# EAGLE board daughterboard (EAGLE 9.5.2)

Size 256.21 x 198.11 mm. Coordinates in mm from the lower left corner, seen from the top.
Outline: 0,0 256.21,0 256.21,198.11 0,198.11 0,0
Copper layers (1*16): Top 0.035mm / dielectric 1.5mm / Bottom 0.035mm
Design rules "default": minimum track width 6mil, minimum drill 0.35mm, track to track 6mil, track to pad 6mil, pad to pad 6mil, via to via 6mil, smd to smd 6mil, copper to edge 40mil, drill to drill 6mil, minimum pad ring 10mil, minimum via ring 8mil, stop-mask expansion 4mil, vias tented up to drill 0mil, thermal gap 10mil

## Footprints (pad centres in the part's own frame; a part is rotated, then mirrored left to right if it is on the bottom)
1X02/90 = drill 1.016 long: 1 -1.27,-3.81; 2 1.27,-3.81
0204/5 = drill 0.813 octagon: 1 -2.54,0; 2 2.54,0
AC01 = drill 1.1 pad 2: 1 -8.9,0; 2 8.9,0
MX1A-XXNN = drill 1.5: 1 -3.81,2.54; 2 2.54,5.08 | hole 4: 0,0
TO92 = drill 0.813 octagon: 1 1.27,0; 2 0,1.905; 3 -1.27,0
W12864 = smd 1.8 x 2.5: 1 15.24,-33.02; 2 12.7,-33.02; 02 12.7,-33.02; 3 10.16,-33.02; 4 7.62,-33.02; 5 5.08,-33.02; 6 2.54,-33.02; 7 0,-33.02; 8 -2.54,-33.02; 9 -5.08,-33.02; 10 -7.62,-33.02; 11 -10.16,-33.02; 12 -12.7,-33.02; 13 -15.24,-33.02; 14 -17.78,-33.02; 15 -20.32,-33.02; 16 -22.86,-33.02; 17 -25.4,-33.02; 18 -27.94,-33.02; 19 -30.48,-33.02; 20 -33.02,-33.02 | drill 0.8 square: P$1 15.24,-33.02; P$2 -33.02,-33.02; P$3 -30.48,-33.02; P$4 -27.94,-33.02; P$5 -25.4,-33.02; P$6 -22.86,-33.02; P$7 -20.32,-33.02; P$8 -17.78,-33.02; P$9 -15.24,-33.02; P$10 -12.7,-33.02; P$11 -10.16,-33.02; P$12 -7.62,-33.02; P$13 -5.08,-33.02; P$14 -2.54,-33.02; P$15 0,-33.02; P$16 2.54,-33.02; P$17 5.08,-33.02; P$18 7.62,-33.02; P$19 10.16,-33.02; P$20 12.7,-33.02
BLUE_PILL = drill 0.8 long: P$1 -7.62,15.24; P$2 -7.62,12.7; P$3 -7.62,10.16; P$4 -7.62,7.62; P$5 -7.62,5.08; P$6 -7.62,2.54; P$7 -7.62,0; P$8 -7.62,-2.54; P$9 -7.62,-5.08; P$10 -7.62,-7.62; P$11 -7.62,-10.16; P$12 -7.62,-12.7; P$13 -7.62,-15.24; P$14 -7.62,-17.78; P$15 -7.62,-20.32; P$16 -7.62,-22.86; P$17 -7.62,-25.4; P$18 -7.62,-27.94; P$19 -7.62,-30.48; P$20 -7.62,-33.02; P$21 7.62,15.24; P$22 7.62,12.7; P$23 7.62,10.16; P$24 7.62,7.62; P$25 7.62,5.08; P$26 7.62,2.54; P$27 7.62,0; P$28 7.62,-2.54; P$29 7.62,-5.08; P$30 7.62,-7.62; P$31 7.62,-10.16; P$32 7.62,-12.7; P$33 7.62,-15.24; P$34 7.62,-17.78; P$35 7.62,-20.32; P$36 7.62,-22.86; P$37 7.62,-25.4; P$38 7.62,-27.94; P$39 7.62,-30.48; P$40 7.62,-33.02
BATTERY-CHARGER-LI-PROT = drill 1.2 pad 2.5 square: B+ 10.795,3.81; B- 10.795,-3.81; IN+ -12.065,6.985; IN- -12.065,-6.985; OUT+ 10.795,6.985; OUT- 10.795,-6.985
AI-THINKER_RA-01 = smd 2.184 x 1.067: P$1 -8,7; P$2 -8,5; P$3 -8,3; P$4 -8,1; P$5 -8,-1; P$6 -8,-3; P$7 -8,-5; P$8 -8,-7; P$9 8,-7; P$10 8,-5; P$11 8,-3; P$12 8,-1; P$13 8,1; P$14 8,3; P$15 8,5; P$16 8,7
DC-DC-STEP-UP-5V = drill 1: 5V 6.985,-3.81; D+ 6.985,1.27; D- 6.985,-1.27; GND 6.985,3.81 | drill 1 pad 2 square: IN+ -10.795,6.985; IN- -10.795,-6.985

## Placement (x,y rotation side)
JP1  [1X02/90]  -35.56,129.54 0 top  (outside the outline)
R1  10k  [0204/5]  -110.49,-3.81 0 top  (outside the outline)
R3  10k  [AC01]  -91.44,125.73 0 top  (outside the outline)
R7  10k  [AC01]  -22.86,143.51 0 top  (outside the outline)
SW1  CHERRY_MX  [MX1A-XXNN]  76.2,63.5 0 bottom
SW2  CHERRY_MX  [MX1A-XXNN]  57.15,63.5 0 bottom
SW3  CHERRY_MX  [MX1A-XXNN]  38.1,63.5 0 bottom
SW4  CHERRY_MX  [MX1A-XXNN]  19.05,63.5 0 bottom
SW5  CHERRY_MX  [MX1A-XXNN]  -187.96,-3.81 0 top  (outside the outline)
SW6  CHERRY_MX  [MX1A-XXNN]  -204.47,-3.81 0 top  (outside the outline)
SW7  CHERRY_MX  [MX1A-XXNN]  -220.98,-3.81 0 top  (outside the outline)
SW8  CHERRY_MX  [MX1A-XXNN]  -237.49,-3.81 0 top  (outside the outline)
SW9  CHERRY_MX  [MX1A-XXNN]  -254,-3.81 0 top  (outside the outline)
SW10  CHERRY_MX  [MX1A-XXNN]  -270.51,-3.81 0 top  (outside the outline)
SW11  CHERRY_MX  [MX1A-XXNN]  -270.51,-20.32 0 top  (outside the outline)
SW12  CHERRY_MX  [MX1A-XXNN]  -270.51,-36.83 0 top  (outside the outline)
SW13  CHERRY_MX  [MX1A-XXNN]  -270.51,-53.34 0 top  (outside the outline)
SW14  CHERRY_MX  [MX1A-XXNN]  -270.51,-69.85 0 top  (outside the outline)
T2  BC337  [TO92]  -110.49,-10.16 0 top  (outside the outline)
U$1  W12864  [W12864]  48.26,38.1 0 top
U$2  [BLUE_PILL]  34.29,77.47 90 top
U$3  BATTERY-CHARGER-LI-PROT  [BATTERY-CHARGER-LI-PROT]  85.09,15.24 90 top
U$4  AI-THINKER_RA-01  [AI-THINKER_RA-01]  -22.86,132.08 0 top  (outside the outline)
U$5  DC-DC-STEP-UP-5V  [DC-DC-STEP-UP-5V]  16.51,17.78 0 top

## Library data of the parts
JP1 = pinhead
R1 = rcl; SPICEPREFIX: R
R3 R7 = resistor-power; OC_FARNELL: unknown; OC_NEWARK: unknown
SW1-SW14 = Cherry_MX_v7.0
T2 = transistor
U$1 = ST7920 w12864
U$2 = BluePill
U$3 = diy-modules
U$4 = lora-ra-02-minimal-because-labels-fuckup-rotating
U$5 = 5v-step-up-minimal

## Nets
+3V3: U$2.P$20 U$2.P$23 U$4.P$3
+5V: U$1.2 U$1.19 U$2.P$18 U$5.5V
GND: R7.2 SW1.2 SW2.2 SW3.2 SW4.2 SW5.2 SW6.2 SW7.2 SW8.2 SW9.2 SW10.2 SW11.2 SW12.2 SW13.2 SW14.2 T2.1 U$1.1 U$2.P$19 U$2.P$22 U$3.OUT- U$4.P$2 U$4.P$16 U$5.GND U$5.IN-
GND1: U$2.P$21
N$1: JP1.1 U$3.OUT+
N$3: U$2.P$25 U$4.P$4
N$4: U$2.P$28 U$4.P$15
N$5: U$2.P$29 U$4.P$14
N$6: U$2.P$30 U$4.P$13
N$7: U$2.P$31 U$4.P$12
N$8: U$2.P$26 U$4.P$5
N$9: U$1.6 U$2.P$35
N$10: U$1.5 U$2.P$34
N$11: U$1.17 U$2.P$32
N$12: U$1.4 U$2.P$33
N$13: R1.2 T2.2
N$14: T2.3 U$1.20
N$15: SW1.1 U$2.P$17
N$16: JP1.2 R3.1 U$5.IN+
N$17: SW2.1 U$2.P$16
N$18: R1.1 U$2.P$36
N$19: SW3.1 U$2.P$15
N$20: SW4.1 U$2.P$14
N$21: SW5.1 U$2.P$13
N$22: SW6.1 U$2.P$12
N$23: SW7.1 U$2.P$11
N$24: R3.2 R7.1 U$2.P$27
N$25: SW8.1 U$2.P$10
N$26: SW9.1 U$2.P$7
N$27: SW10.1 U$2.P$6
N$29: SW13.1 SW14.1 U$2.P$3
N$30: SW11.1 U$2.P$5
N$31: SW12.1 U$2.P$4

## Tracks (layer width: path | path; a pad name or v marks a point on that pad's centre or on a via)
+3V3  (2 unrouted)
+5V  (3 unrouted)
GND  (23 unrouted)
N$1  (1 unrouted)
N$3  (1 unrouted)
N$4  (1 unrouted)
N$5  (1 unrouted)
N$6  (1 unrouted)
N$7  (1 unrouted)
N$8  (1 unrouted)
N$9  (1 unrouted)
N$10  (1 unrouted)
N$11  (1 unrouted)
N$12  (1 unrouted)
N$13  (1 unrouted)
N$14  (1 unrouted)
N$15  (1 unrouted)
N$16  (2 unrouted)
N$17  (1 unrouted)
N$18  (1 unrouted)
N$19  (1 unrouted)
N$20  (1 unrouted)
N$21  (1 unrouted)
N$22  (1 unrouted)
N$23  (1 unrouted)
N$24  (2 unrouted)
N$25  (1 unrouted)
N$26  (1 unrouted)
N$27  (1 unrouted)
N$29  (2 unrouted)
N$30  (1 unrouted)
N$31  (1 unrouted)